# EAGLE board main_209 (EAGLE 6.4)
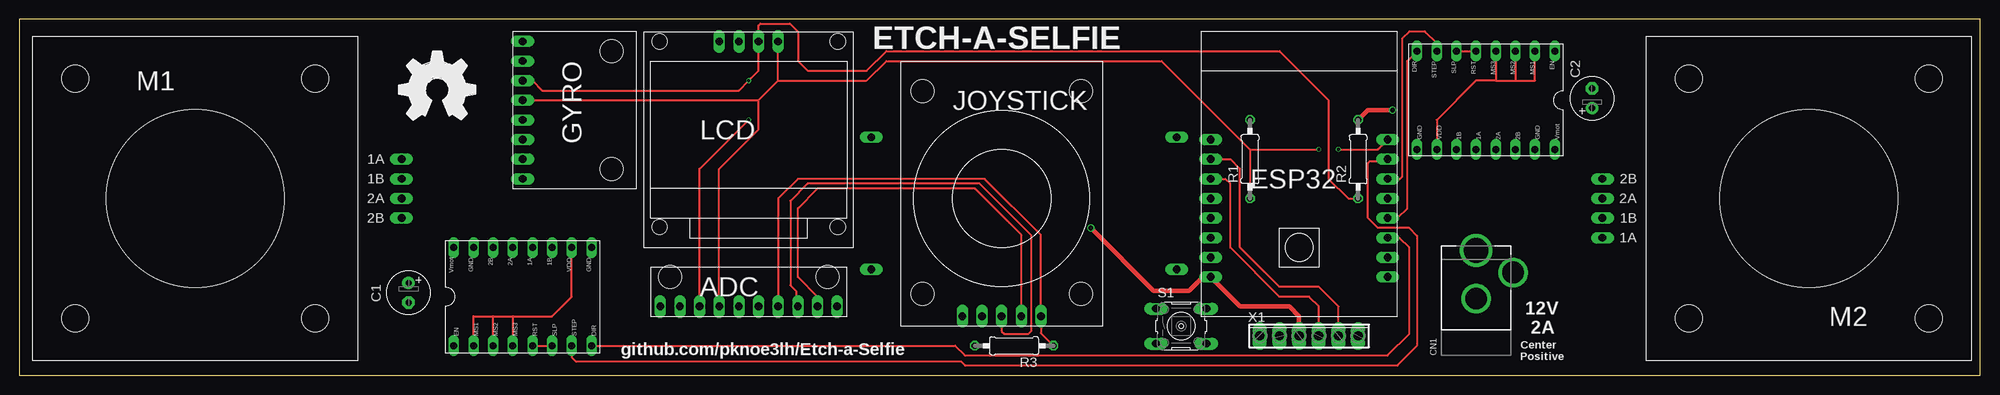
[diagram p0: board, top side]
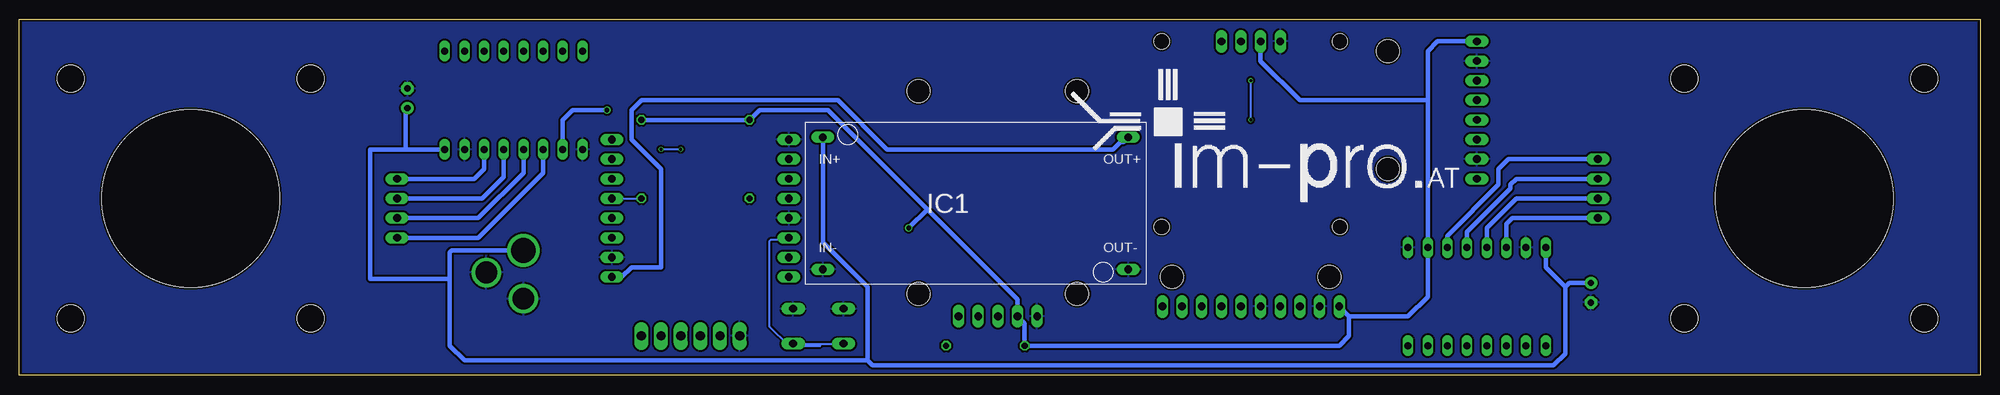
[diagram p1: board, bottom side, seen from below]

Size 253.34 x 46.03 mm. Coordinates in mm from the lower left corner, seen from the top.
Outline: 0,0 253.34,0 253.34,46.03 0,46.03 0,0
Copper layers (1*16): Top 0.035559375mm / dielectric 1.6mm / Bottom 0.035559375mm
Design rules "jlcpcb2layer": minimum track width 5mil, minimum drill 12mil, track to track 5mil, track to pad 5mil, pad to pad 5mil, via to via 5mil, smd to smd 5mil, copper to edge 8mil, drill to drill 6mil, minimum pad ring 5mil, minimum via ring 3mil, stop-mask expansion 2.5mil, vias tented up to drill 0mil, thermal gap 10mil

## Footprints (pad centres in the part's own frame; a part is rotated, then mirrored left to right if it is on the bottom)
ADC = drill 1 long: A0 3.81,0; A1 6.35,0; A2 8.89,0; A3 11.43,0; ADDR -1.27,0; ALERT 1.27,0; GND -8.89,0; SCL -6.35,0; SDA -3.81,0; VCC -11.43,0 | hole 3: -10.16,3.81; 10.16,3.81
E2,5-6 = drill 0.813 pad 1.6: + -1.27,0 | drill 0.813 pad 1.6 octagon: - 1.27,0
DCJACK_2MM_PTH = drill 2.8: GND 0,7.35; GNDBREAK 4.8,10.75 | drill 3.2: PWR 0,13.6
ESP32_CAM = drill 1 long: 3V3 -11.43,-12.7; 5V 11.43,-12.7; GND1 -11.43,5.08; GND2 -11.43,-5.08; GND3 11.43,-10.16; GPIO0 -11.43,-7.62; GPIO1 -11.43,2.54; GPIO2 11.43,2.54; GPIO3 -11.43,0; GPIO4 11.43,5.08; GPIO12 11.43,-7.62; GPIO13 11.43,-5.08; GPIO14 11.43,0; GPIO15 11.43,-2.54; GPIO16 -11.43,-10.16; P_OUT -11.43,-2.54
MPU6050 = drill 1 long: AD0 6.35,0; GND -6.35,0; INT 8.89,0; SCL -3.81,0; SDA -1.27,0; VCC -8.89,0; XCL 3.81,0; XDA 1.27,0 | hole 3: -7.62,11.5; 7.62,11.5
DCDC = drill 1 long: GND1 -19.73,-8.55; GND2 19.73,-8.55; VIN -19.73,8.55; VOUT 19.73,8.55
A4988BREAKOUT = drill 0.9 long: 1A 8.89,1.27; 1B 11.43,1.27; 2A 6.35,1.27; 2B 3.81,1.27; DIR 16.51,-11.43; EN -1.27,-11.43; GND 16.51,1.27; GND@0 1.27,1.27; MS1 1.27,-11.43; MS2 3.81,-11.43; MS3 6.35,-11.43; RST 8.89,-11.43; SLP 11.43,-11.43; STEP 13.97,-11.43; VDD 13.97,1.27; VMOT -1.27,1.27
JOYSTICK = drill 1 long: GND -5.08,0; SW 5.08,0; VCC -2.54,0; VR1 0,0; VR2 2.54,0 | hole 3: -10.25,2.9; 10.25,2.9; -10.25,29.1; 10.25,29.1
OLCD = drill 1 long: GND -3.81,0; SCL 1.27,0; SDA 3.81,0; VCC -1.27,0 | hole 2: -11.5,0; 11.5,0; -11.5,-24; 11.5,-24
NEMA17 = drill 1 long: 1A 26.67,5.08; 1B 26.67,2.54; 2A 26.67,0; 2B 26.67,-2.54 | hole 3.5: -15.5,-15.5; -15.5,15.5; 15.5,15.5; 15.5,-15.5 | hole 23: 0,0
0207/10 = drill 0.813 octagon: 1 -5.08,0; 2 5.08,0
B3F-10XX = drill 1.016 long: 1 -3.251,2.261; 2 3.251,2.261; 3 -3.251,-2.261; 4 3.251,-2.261
6POL254 = drill 1.2 pad 1.778 long: 1 -6.35,0; 2 -3.81,0; 3 -1.27,0; 4 1.27,0; 5 3.81,0; 6 6.35,0

## Placement (x,y rotation side)
ADC  ADC  [ADC]  94.23,8.89 0 top
C1  [E2,5-6]  50.29,10.67 270 top
C2  [E2,5-6]  203.2,35.81 90 top
CN1  [DCJACK_2MM_PTH]  188.21,2.54 0 top
ESP32  ESP32_CAM  [ESP32_CAM]  165.35,25.4 0 top
GYRO  MPU6050  [MPU6050]  65.02,34.29 270 top
IC1  DCDC  [DCDC]  129.79,22.22 0 bottom
IC2  A4988BREAKOUT  [A4988BREAKOUT]  57.4,15.24 0 top
IC3  A4988BREAKOUT  [A4988BREAKOUT]  197.1,30.48 180 top
JOYSTICK  JOYSTICK  [JOYSTICK]  126.91,7.62 0 top
LCD  OLCD  [OLCD]  94.23,43.18 0 top
LOGO1  OHW-LOGO_OSHW_LOGO_FILLX0350-NT  [OHW-LOGO_OSHW_FILLX350_NOTEXT]  49.02,33.02 0 top
M1  NEAM17  [NEMA17]  22.71,22.86 0 top
M2  NEAM17  [NEMA17]  231.21,22.86 180 top
R1  4k7  [0207/10]  159,27.94 90 top
R2  4k7  [0207/10]  172.97,27.94 90 top
R3  4k7  [0207/10]  128.52,3.81 180 top
S1  [B3F-10XX]  150.11,6.35 0 top
X1  [6POL254]  166.62,5.08 0 top

## Library data of the parts
ADC ESP32 GYRO IC1 JOYSTICK LCD M1 M2 = main
C1 C2 R1-R3 = rcl
CN1 = microbuilder
IC2 IC3 = stepperdriver
LOGO1 = BBLeo_v2
S1 = switch-omron; MPN: B3F-1000; OC_FARNELL: 176432; OC_NEWARK: 36M3542
X1 = con-phoenix-254; OC_FARNELL: unknown; OC_NEWARK: unknown

## Nets
+3V3: ADC.VCC ESP32.3V3 GYRO.VCC IC2.MS1 IC2.MS2 IC2.MS3 IC2.VDD IC3.MS1 IC3.MS2 IC3.MS3 IC3.VDD JOYSTICK.VCC LCD.VCC R1.2 R2.2 R3.2 X1.3
+5V: ESP32.5V IC1.VOUT
+12V: C1.+ C2.+ CN1.PWR IC1.VIN IC2.VMOT IC3.VMOT
DIR1: ESP32.GPIO12 IC2.DIR
DIR2: ESP32.GPIO13 IC3.DIR
GND: ADC.ADDR ADC.GND C1.- C2.- CN1.GND CN1.GNDBREAK ESP32.GND1 ESP32.GND2 ESP32.GND3 GYRO.AD0 GYRO.GND IC1.GND1 IC1.GND2 IC2.GND IC2.GND@0 IC3.GND IC3.GND@0 JOYSTICK.GND LCD.GND S1.1 S1.2 X1.1
N$1: IC2.1B M1.1A
N$2: IC2.RST IC2.SLP
N$3: IC2.2B M1.2B
N$4: IC2.2A M1.2A
N$5: IC2.1A M1.1B
N$6: IC3.RST IC3.SLP
N$7: IC3.2B M2.2B
N$8: IC3.2A M2.2A
N$9: IC3.1A M2.1B
N$10: IC3.1B M2.1A
N$11: ESP32.GPIO1 X1.5
N$12: ESP32.GPIO3 X1.4
N$13: ESP32.GPIO0 S1.3 S1.4
N$14: ADC.A0 JOYSTICK.SW R3.1
N$15: ADC.A1 JOYSTICK.VR1
N$16: ADC.A2 JOYSTICK.VR2
N$18: ADC.SCL ESP32.GPIO15 GYRO.SCL LCD.SCL R2.1
N$19: ADC.SDA ESP32.GPIO4 GYRO.SDA LCD.SDA R1.1
STEP1: ESP32.GPIO2 IC2.STEP
STEP2: ESP32.GPIO14 IC3.STEP

## Tracks (layer width: path | path; a pad name or v marks a point on that pad's centre or on a via)
+3V3  (via drill 0.6)
  Top 0.254: IC3.MS3 190.75,38.1 | 190.75,38.1 193.29,38.1 | 193.29,38.1 195.83,38.1 IC3.MS1 | IC3.MS2 193.29,38.1 | 190.75,38.1 188.21,38.1 183.13,33.02 IC3.VDD | IC2.MS1 58.67,7.62 61.21,7.62 | 61.21,7.62 63.75,7.62 | 63.75,7.62 IC2.MS3 | IC2.MS2 61.21,7.62 | 63.75,7.62 68.83,7.62 71.37,10.16 IC2.VDD
  Top 0.61: X1.3 165.35,7.62 164.08,8.89 157.73,8.89 ESP32.3V3 152.91,12.7 151.13,10.92 146.56,10.92 v138.43,19.05 | v177.42,34.29 174.24,34.29 R2.2
  Bottom 0.61: 183.13,30.48 IC3.VDD 183.13,33.02 181.86,34.29 v177.42,34.29 | 71.37,35.56 IC2.VDD 71.37,10.16 73.91,7.62 81.53,7.62 | 71.37,35.56 71.37,41.91 70.1,43.18 GYRO.VCC | 71.37,35.56 87.88,35.56 92.96,40.64 LCD.VCC | ADC.VCC 81.53,7.62 | 81.53,7.62 81.53,5.08 82.8,3.81 R3.2 123.44,6.69 JOYSTICK.VCC 124.37,9.82 136.02,21.46 | 136.02,21.46 148.84,34.29 157.73,34.29 R1.2 R2.2 | v138.43,19.05 136.02,21.46
+5V
  Bottom 0.61: ESP32.5V 175.51,12.7 174.24,13.97 170.43,13.97 170.43,26.67 174.24,30.48 174.24,34.29 172.97,35.56 147.57,35.56 141.22,29.21 112.01,29.21 111.08,30.14 110.7,30.14 IC1.VOUT
+12V
  Bottom 0.61: 197.74,12.45 197.74,15.88 197.47,16.14 CN1.PWR | 197.74,12.45 197.74,3.81 195.83,1.91 143.76,1.91 | 53.59,11.43 53.59,2.79 55.12,1.27 143.13,1.27 143.76,1.91 | 53.59,11.43 56.13,13.97 IC2.VMOT | IC1.VIN 149.52,17.19 143.76,11.43 143.76,1.91 | 203.45,29.21 208.03,29.21 208.03,12.45 197.74,12.45 | C1.+ 53.09,11.94 53.59,11.43 | IC3.VMOT 203.45,29.21 | 203.45,29.21 203.45,34.29 C2.+
DIR1
  Top 0.254: IC2.DIR 120.9,3.81 122.17,2.54 176.78,2.54 179.58,5.33 179.58,16.51 178.31,17.78 ESP32.GPIO12
DIR2
  Top 0.254: ESP32.GPIO13 178.05,20.32 179.32,21.59 179.32,40.64 IC3.DIR
GND
  pour Bottom (isolate 0.254): 0.51,0 252.86,0 252.86,45.72 0.51,45.72
N$1
  Bottom 0.61: M1.1A 60.96,27.94 62.23,26.67 62.23,24.64 68.83,18.03 IC2.1B
N$2
  Top 0.254: IC2.RST IC2.SLP
N$3
  Bottom 0.61: M1.2B 60.45,20.32 61.21,19.56 IC2.2B
N$4
  Bottom 0.61: M1.2A 59.94,22.86 63.75,19.05 IC2.2A
N$5
  Bottom 0.61: M1.1B 59.94,25.4 60.71,24.64 60.71,24.13 66.29,18.54 IC2.1A
N$6
  Top 0.254: IC3.SLP IC3.RST
N$7
  Bottom 0.61: M2.2B 194.56,25.4 193.29,26.67 IC3.2B
N$8
  Bottom 0.61: M2.2A 193.55,22.86 190.75,25.65 IC3.2A
N$9
  Bottom 0.61: M2.1B 194.06,20.32 188.21,26.16 IC3.1A
N$10
  Bottom 0.61: M2.1A 194.06,17.78 185.67,26.16 IC3.1B
N$11
  Top 0.254: X1.5 170.43,8.89 167.89,11.43 162.81,11.43 157.73,16.51 157.73,26.67 156.46,27.94 ESP32.GPIO1
N$12
  Top 0.254: X1.4 167.89,8.89 166.62,10.16 162.81,10.16 156.46,16.51 156.46,24.77 155.83,25.4 ESP32.GPIO3
N$13
  Bottom 0.254: S1.3 S1.4 149.83,3.81 153.92,3.81 156.46,6.35 156.46,17.27 156.21,17.53 154.18,17.53 ESP32.GPIO0
N$14
  Top 0.254: R3.1 131.99,5.42 JOYSTICK.SW 131.99,18.12 124.71,25.4 100.58,25.4 98.04,22.86 ADC.A0
N$15
  Top 0.254: ADC.A1 100.33,9.14 100.33,10.92 99.63,11.62 99.63,22.54 101.85,24.77 124.08,24.77 130.75,18.1 130.75,5.71 130.36,5.33 127.25,5.33 126.91,5.67 JOYSTICK.VR1
N$16
  Top 0.254: JOYSTICK.VR2 129.45,18.12 123.44,24.13 103.12,24.13 100.58,21.59 100.58,12.7 103.12,10.16 ADC.A2
N$18  (via drill 0.4)
  Top 0.254: ADC.SCL 87.88,26.67 v94.23,33.02 | R2.1 171.7,22.86 169.16,25.4 169.16,35.56 162.81,41.91 112.01,41.91 109.47,39.37 101.85,39.37 100.58,40.64 100.58,44.45 99.57,45.47 95.76,45.47 95.5,45.21 LCD.SCL 95.5,39.37 v94.23,38.1 92.96,36.83 67.56,36.83 66.29,38.1 GYRO.SCL
  Bottom 0.254: v94.23,33.02 v94.23,38.1 | ESP32.GPIO15 R2.1
N$19  (via drill 0.4)
  Top 0.254: GYRO.SDA 95.5,35.56 | 95.5,35.56 98.04,38.1 | 98.04,38.1 LCD.SDA | ADC.SDA 90.42,26.67 95.5,31.75 95.5,35.56 | 98.04,38.1 109.47,38.1 112.01,40.64 147.57,40.64 159,29.21 | 159,29.21 R1.1 | 159,29.21 v167.89,29.21 | v170.43,29.21 175.51,29.21 ESP32.GPIO4
  Bottom 0.254: v167.89,29.21 v170.43,29.21
STEP1
  Top 0.254: ESP32.GPIO2 176.53,27.69 174.5,27.69 174.24,27.43 174.24,20.32 175.51,19.05 179.58,19.05 180.59,18.03 180.59,3.81 178.05,1.27 122.17,1.27 121.67,1.78 71.88,1.78 71.37,2.29 IC2.STEP
STEP2
  Top 0.254: ESP32.GPIO14 178.37,25.4 178.69,25.72 178.69,43.56 179.58,44.45 181.61,44.45 183.13,42.93 IC3.STEP

## Text on the board
tPlace: ETCH-A-SELFIE | 12V | 2A | github.com/pknoe3lh/Etch-a-Selfie | Center / Positive